# Altium PCB PAY_IFP_V1.PcbDoc (part 2 of 5)
Units mil, origin at the board's own origin, x right, y up, seen from the top; angles counter-clockwise.
Board outline 3661.42 x 3543.31 mil, 6 copper layers (L1 TOP, L2 GND 1, L3 SIGNAL, L4 PWR, L5 GND 2, L6 BOT), stack 59.685 mil thick; 511 components, 371 nets, 2264 pads, 383 vias.
Unrouted connection lines stored in the file: 1001.
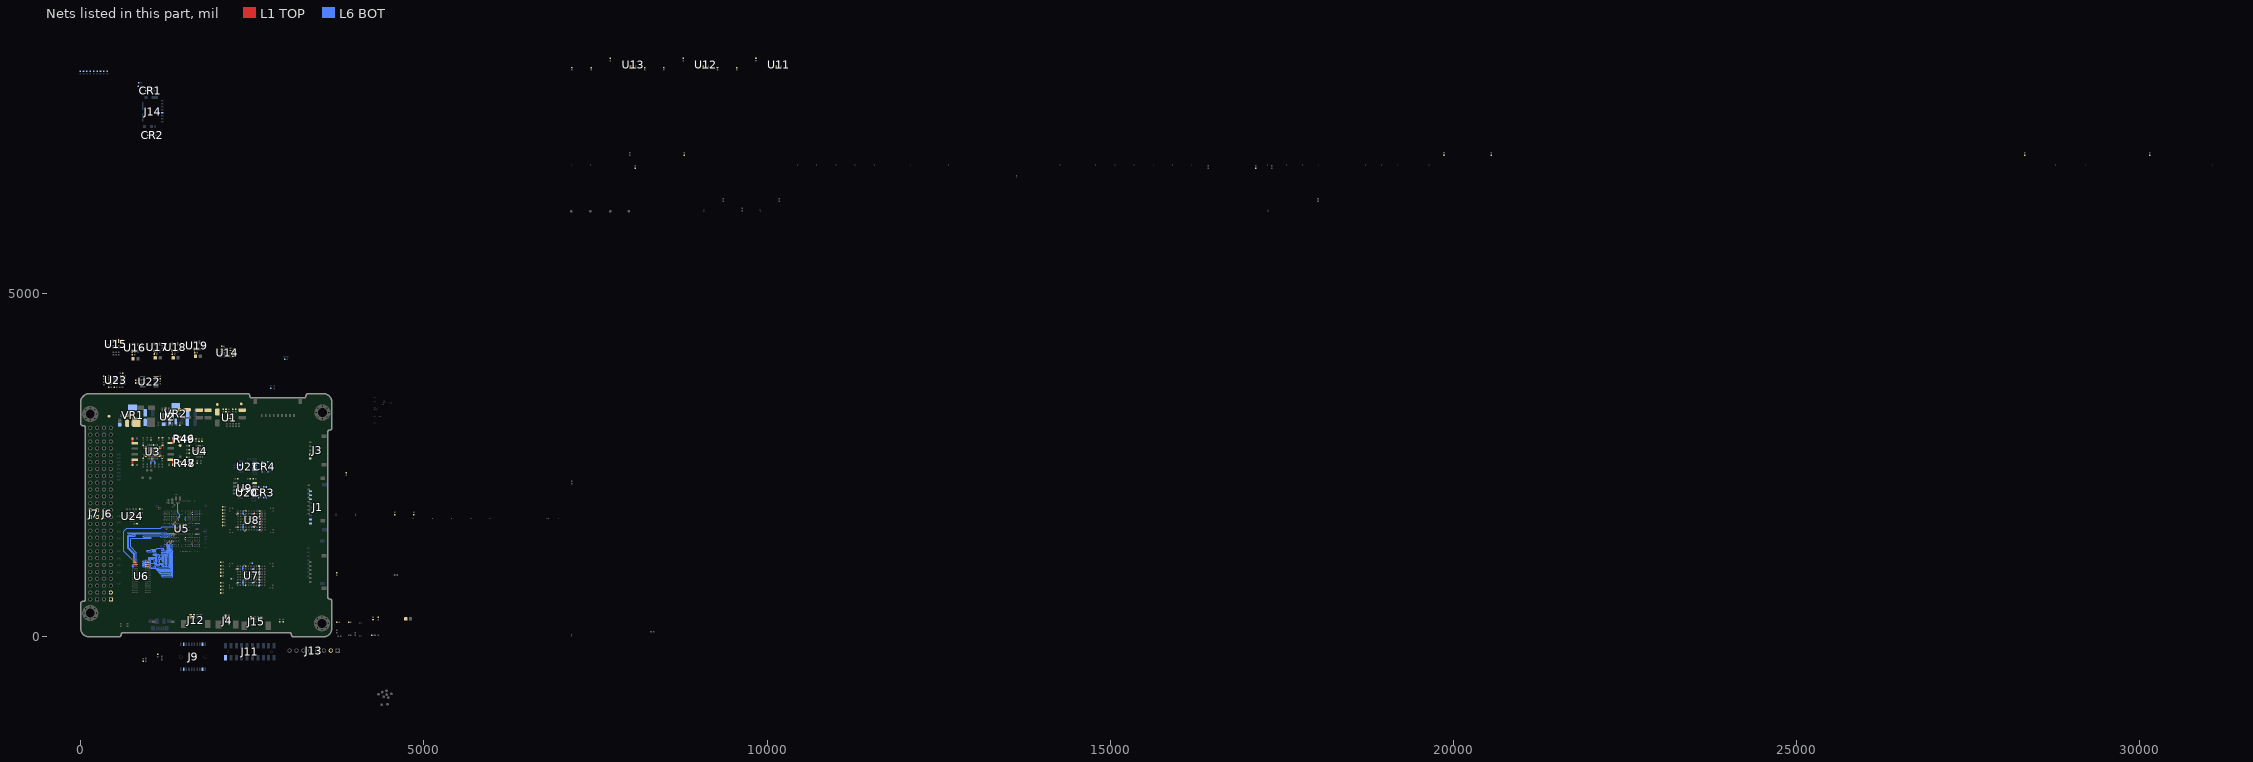
[diagram p2: the nets of this part, all layers, seen from the top]

## Footprints (in the part's own frame and the unit in brackets; to place one, negate y for a bottom-side part, rotate by r counter-clockwise, add the part's x,y. Pads: shape width x height; smd on the part's side, far side on the other; paste and mask are expansions set on the pad) (continued)
BGA_100_C_100P_10X17_1400X1800X150#1 [mm] "BGA, 100-Leads, Body 14.00x18.00mmx1.50mm, Pitch 1.00mm"
  round 0.49 smd: A1(-4.5,8) A2(-3.5,8) A9(3.5,8) A10(4.5,8) B1(-4.5,7) B10(4.5,7) D2(-3.5,5) D3(-2.5,5) D4(-1.5,5) D5(-0.5,5) D6(0.5,5) D7(1.5,5) D8(2.5,5) D9(3.5,5) E2(-3.5,4) E3(-2.5,4) E4(-1.5,4) E5(-0.5,4) E6(0.5,4) E7(1.5,4) E8(2.5,4) E9(3.5,4) F2(-3.5,3) F3(-2.5,3) F4(-1.5,3) F5(-0.5,3) F6(0.5,3) F7(1.5,3) F8(2.5,3) F9(3.5,3) G2(-3.5,2) G3(-2.5,2) G4(-1.5,2) G5(-0.5,2) G6(0.5,2) G7(1.5,2) G8(2.5,2) G9(3.5,2) H2(-3.5,1) H3(-2.5,1) H4(-1.5,1) H5(-0.5,1) H6(0.5,1) H7(1.5,1) H8(2.5,1) H9(3.5,1) J2(-3.5,0) J3(-2.5,0) J4(-1.5,0) J5(-0.5,0) J6(0.5,0) J7(1.5,0) J8(2.5,0) J9(3.5,0) K2(-3.5,-1) K3(-2.5,-1) K4(-1.5,-1) K5(-0.5,-1) K6(0.5,-1) K7(1.5,-1) K8(2.5,-1) K9(3.5,-1) L2(-3.5,-2) L3(-2.5,-2) L4(-1.5,-2) L5(-0.5,-2) L6(0.5,-2) L7(1.5,-2) L8(2.5,-2) L9(3.5,-2) M2(-3.5,-3) M3(-2.5,-3) M4(-1.5,-3) M5(-0.5,-3) M6(0.5,-3) M7(1.5,-3) M8(2.5,-3) M9(3.5,-3) N2(-3.5,-4) N3(-2.5,-4) N4(-1.5,-4) N5(-0.5,-4) N6(0.5,-4) N7(1.5,-4) N8(2.5,-4) N9(3.5,-4) P2(-3.5,-5) P3(-2.5,-5) P4(-1.5,-5) P5(-0.5,-5) P6(0.5,-5) P7(1.5,-5) P8(2.5,-5) P9(3.5,-5) T1(-4.5,-7) T10(4.5,-7) U1(-4.5,-8) U2(-3.5,-8) U9(3.5,-8) U10(4.5,-8)
  round 0.35 on Mech8 paste+0 mask+0: A1(-4.5,8) A2(-3.5,8) A9(3.5,8) B1(-4.5,7) B10(4.5,7) D2(-3.5,5) D3(-2.5,5) D4(-1.5,5) D5(-0.5,5) D6(0.5,5) D7(1.5,5) D8(2.5,5) D9(3.5,5) E2(-3.5,4) E3(-2.5,4) E4(-1.5,4) E5(-0.5,4) E6(0.5,4) E7(1.5,4) E8(2.5,4) E9(3.5,4) F2(-3.5,3) F3(-2.5,3) F4(-1.5,3) F5(-0.5,3) F6(0.5,3) F7(1.5,3) F8(2.5,3) F9(3.5,3) G2(-3.5,2) G3(-2.5,2) G4(-1.5,2) G5(-0.5,2) G6(0.5,2) G7(1.5,2) G8(2.5,2) G9(3.5,2) H2(-3.5,1) H3(-2.5,1) H4(-1.5,1) H5(-0.5,1) H6(0.5,1) H7(1.5,1) H8(2.5,1) H9(3.5,1) J2(-3.5,0) J3(-2.5,0) J4(-1.5,0) J5(-0.5,0) J6(0.5,0) J7(1.5,0) J8(2.5,0) J9(3.5,0) K2(-3.5,-1) K3(-2.5,-1) K4(-1.5,-1) K5(-0.5,-1) K6(0.5,-1) K7(1.5,-1) K8(2.5,-1) K9(3.5,-1) L2(-3.5,-2) L3(-2.5,-2) L4(-1.5,-2) L5(-0.5,-2) L6(0.5,-2) L7(1.5,-2) L8(2.5,-2) L9(3.5,-2) M2(-3.5,-3) M3(-2.5,-3) M4(-1.5,-3) M5(-0.5,-3) M6(0.5,-3) M7(1.5,-3) M8(2.5,-3) M9(3.5,-3) N2(-3.5,-4) N3(-2.5,-4) N4(-1.5,-4) N5(-0.5,-4) N6(0.5,-4) N7(1.5,-4) N8(2.5,-4) N9(3.5,-4) P2(-3.5,-5) P3(-2.5,-5) P4(-1.5,-5) P5(-0.5,-5) P6(0.5,-5) P7(1.5,-5) P8(2.5,-5) P9(3.5,-5) T1(-4.5,-7) T10(4.5,-7) U1(-4.5,-8) U2(-3.5,-8) U9(3.5,-8) U10(4.5,-8) ""(4.5,8)
  silkscreen extent -7.77,-9 7,9, body extent -7,-9 7,9, height 1.5
BGA_100_C_100P_10X17_1400X1800X150#2 [mm] "BGA, 100-Leads, Body 14.00x18.00mmx1.50mm, Pitch 1.00mm"
  round 0.49 smd: A1(-4.5,8) A2(-3.5,8) A9(3.5,8) A10(4.5,8) B1(-4.5,7) B10(4.5,7) D2(-3.5,5) D3(-2.5,5) D4(-1.5,5) D5(-0.5,5) D6(0.5,5) D7(1.5,5) D8(2.5,5) D9(3.5,5) E2(-3.5,4) E3(-2.5,4) E4(-1.5,4) E5(-0.5,4) E6(0.5,4) E7(1.5,4) E8(2.5,4) E9(3.5,4) F2(-3.5,3) F3(-2.5,3) F4(-1.5,3) F5(-0.5,3) F6(0.5,3) F7(1.5,3) F8(2.5,3) F9(3.5,3) G2(-3.5,2) G3(-2.5,2) G4(-1.5,2) G5(-0.5,2) G6(0.5,2) G7(1.5,2) G8(2.5,2) G9(3.5,2) H2(-3.5,1) H3(-2.5,1) H4(-1.5,1) H5(-0.5,1) H6(0.5,1) H7(1.5,1) H8(2.5,1) H9(3.5,1) J2(-3.5,0) J3(-2.5,0) J4(-1.5,0) J5(-0.5,0) J6(0.5,0) J7(1.5,0) J8(2.5,0) J9(3.5,0) K2(-3.5,-1) K3(-2.5,-1) K4(-1.5,-1) K5(-0.5,-1) K6(0.5,-1) K7(1.5,-1) K8(2.5,-1) K9(3.5,-1) L2(-3.5,-2) L3(-2.5,-2) L4(-1.5,-2) L5(-0.5,-2) L6(0.5,-2) L7(1.5,-2) L8(2.5,-2) L9(3.5,-2) M2(-3.5,-3) M3(-2.5,-3) M4(-1.5,-3) M5(-0.5,-3) M6(0.5,-3) M7(1.5,-3) M8(2.5,-3) M9(3.5,-3) N2(-3.5,-4) N3(-2.5,-4) N4(-1.5,-4) N5(-0.5,-4) N6(0.5,-4) N7(1.5,-4) N8(2.5,-4) N9(3.5,-4) P2(-3.5,-5) P3(-2.5,-5) P4(-1.5,-5) P5(-0.5,-5) P6(0.5,-5) P7(1.5,-5) P8(2.5,-5) P9(3.5,-5) T1(-4.5,-7) T10(4.5,-7) U1(-4.5,-8) U2(-3.5,-8) U9(3.5,-8) U10(4.5,-8)
  round 0.35 on Mech8 paste+0 mask+0: A1(-4.5,8) A2(-3.5,8) A9(3.5,8) A10(4.5,8) B1(-4.5,7) B10(4.5,7) D2(-3.5,5) D3(-2.5,5) D4(-1.5,5) D5(-0.5,5) D6(0.5,5) D7(1.5,5) D8(2.5,5) D9(3.5,5) E2(-3.5,4) E3(-2.5,4) E4(-1.5,4) E5(-0.5,4) E6(0.5,4) E7(1.5,4) E8(2.5,4) E9(3.5,4) F2(-3.5,3) F3(-2.5,3) F4(-1.5,3) F5(-0.5,3) F6(0.5,3) F7(1.5,3) F8(2.5,3) F9(3.5,3) G2(-3.5,2) G3(-2.5,2) G4(-1.5,2) G5(-0.5,2) G6(0.5,2) G7(1.5,2) G8(2.5,2) G9(3.5,2) H2(-3.5,1) H3(-2.5,1) H4(-1.5,1) H5(-0.5,1) H6(0.5,1) H7(1.5,1) H8(2.5,1) H9(3.5,1) J2(-3.5,0) J3(-2.5,0) J4(-1.5,0) J5(-0.5,0) J6(0.5,0) J7(1.5,0) J8(2.5,0) J9(3.5,0) K2(-3.5,-1) K3(-2.5,-1) K4(-1.5,-1) K5(-0.5,-1) K6(0.5,-1) K7(1.5,-1) K8(2.5,-1) K9(3.5,-1) L2(-3.5,-2) L3(-2.5,-2) L4(-1.5,-2) L5(-0.5,-2) L6(0.5,-2) L7(1.5,-2) L8(2.5,-2) L9(3.5,-2) M2(-3.5,-3) M3(-2.5,-3) M4(-1.5,-3) M5(-0.5,-3) M6(0.5,-3) M7(1.5,-3) M8(2.5,-3) M9(3.5,-3) N2(-3.5,-4) N3(-2.5,-4) N4(-1.5,-4) N5(-0.5,-4) N6(0.5,-4) N7(1.5,-4) N8(2.5,-4) N9(3.5,-4) P2(-3.5,-5) P3(-2.5,-5) P4(-1.5,-5) P5(-0.5,-5) P6(0.5,-5) P7(1.5,-5) P8(2.5,-5) P9(3.5,-5) T1(-4.5,-7) T10(4.5,-7) U1(-4.5,-8) U2(-3.5,-8) U9(3.5,-8) U10(4.5,-8)
  silkscreen extent -7.77,-9 7,9, body extent -7,-9 7,9, height 1.5
CAP_C_0603x30 [mm] "Chip Capacitor, 2-Leads, Body 0.6x0.3mm, IPC Medium Density"
  rrect50% 0.275x0.3 smd mask+0.064: 1(-0.262,0) 2(0.262,0)
  body extent -0.3,-0.15 0.3,0.15, height 0.28
CAP_C_1005X50_L [mm] "Chip Capacitor, 2-Leads, Body 1.0x0.5mm, IPC High Density"
  rrect50% 0.55x0.6 smd: 1(-0.45,0) 2(0.45,0)
  body extent -0.5,-0.3 0.5,0.3, height 0.2
CAP_C_1608X80 [mm] "Chip Capacitor, 2-Leads, Body 1.60x0.80mm, IPC Medium Density"
  rrect50% 0.8x0.9 smd: 1(-0.8,0) 2(0.8,0)
  silkscreen extent -0.9,-0.7 0.9,0.7, body extent -0.87,-0.48 0.87,0.48, height 0.85
CAP_C_2012X110 [mm] "Chip Capacitor, 2-Leads, Body 2.00x1.25mm, IPC High Density"
  rrect41% 1.2x1.3 smd: 1(-0.9,0) 2(0.9,0)
  silkscreen extent -1.1,-0.9 1.1,0.9, body extent -1.1,-0.72 1.1,0.72, height 1.1
CAP_C_3225X80 [mm] "Chip Capacitor, 2-Leads, Body 3.20x2.50mm, IPC Medium Density"
  rrect38% 1.3x2.7 smd: 1(-1.4,0) 2(1.4,0)
  silkscreen extent -0.6,-1.35 0.6,1.35, body extent -1.7,-1.35 1.7,1.35, height 0.75
CONV_TPS5430DDAR [mm] "IC REG BUCK ADJ 3A 8SOPWR"
  rrect10% 1.55x0.6 smd mask+0: 1(-2.7,1.905) 2(-2.7,0.635) 3(-2.7,-0.635) 4(-2.7,-1.905) 5(2.7,-1.905) 6(2.7,-0.635) 7(2.7,0.635) 8(2.7,1.905)
  round 0.3 hole 0.2 mask+0: 6(-0.65,1.95) 6(-0.65,-0.65) 6(-0.65,0.65) 6(-0.65,-1.95) 6(0.65,1.95) 6(0.65,-0.65) 6(0.65,0.65) 6(0.65,-1.95)
  rect 2.95x4.9 smd paste+0: 9(0,0)
  silkscreen extent -4.17,-2.69 1.96,2.72, body extent -3,-2.45 3,2.45, height 1.7
CRYSTAL_FC-12M_L2.05W1.2H0.6 [mm] "CRYSTAL 32.768KHZ 12.5PF SMD"
  rect 0.7x1.4 smd mask+0: 1(-0.75,0) 2(0.75,0)
  silkscreen extent -1.4,-1 1.4,1, body extent -1.02,-0.6 1.03,0.6, height 0.6
DIODE_SOT457_1P7X3P1_NEX [mil]
  rect 43.5x18 smd paste+0 mask+0: 1(-51.25,37.4) 2(-51.25,0) 3(-51.25,-37.4) 4(51.25,-37.4) 5(51.25,0) 6(51.25,37.4)
  silkscreen extent -95,-62 35,62, body extent -59,-57 59,57, height 43
DO-214AC_SMA [mm] "Molded Diode, 2-Leads, Body 5.20x2.61mm, IPC Medium Density"
  rrect30% 2.55x1.65 smd: 1(-2.05,0) 2(2.05,0)
  silkscreen extent -3.6,-1.5 2.8,1.5, body extent -2.6,-1.3 2.6,1.3, height 2.4
DS90LV011AQ-Q1 [mm]
  rrect50% 1.21x0.59 smd: 1(-1.255,0.95) 2(-1.255,0) 3(-1.255,-0.95) 4(1.255,-0.95) 5(1.255,0.95)
  silkscreen extent -1.45,-1.45 0.8,1.88, body extent -1.4,-1.45 1.4,1.45, height 1.45
Header_254P_8x1 [mm]
  rect 1.6x1.6 hole 1.1: 1(-8.89,0)
  round 1.6 hole 1.1: 2(-6.35,0) 3(-3.81,0) 4(-1.27,0) 5(1.27,0) 6(3.81,0) 7(6.35,0) 8(8.89,0)
  silkscreen extent -10.16,-1.27 10.16,1.27
HOLE_SPACE [mm]
  round 1 hole 0.5: 1(-2.325,0) 1(-1.644,-1.644) 1(-1.644,1.644) 1(0,-2.286) 1(0,2.325) 1(1.644,-1.644) 1(1.644,1.644) 1(2.325,0)
  round 6 hole 3.3: 1(0,0)
IC_RV-3129-C3-32.768KHZ-OPTION-A-TB-QA [mm]
  rect 0.8x0.5 smd: 1(-1.1,1.6) 2(-1.1,0.8) 3(-1.1,0) 4(-1.1,-0.8) 5(-1.1,-1.6) 6(1.1,-1.6) 7(1.1,-0.8) 8(1.1,0) 9(1.1,0.8) 10(1.1,1.6)
  silkscreen extent -2.25,-1.85 0.38,1.85, body extent -1.25,-1.85 1.25,1.85, height 0.9
IND_C_1008 [mm]
  rect 0.9x2.4 smd mask+0.075: 1(-1,0) 2(1,0)
  silkscreen extent -0.25,-1.1 0.25,1.1, body extent -1.24,-1 1.26,1, height 1.2
JUMPER_1608 [mil]
  round 1 smd: 1(30.51,0)
  round 1 smd paste-99999 mask+4: 2(-30,0)
  L1 TOP region: -14.86,-0.09 3.75,-18.7 -38.37,-18.7 -41.57,-18.06 -44.28,-16.25 -46.1,-13.54 -46.73,-10.33 -46.73,-10.33 -46.73,10.33 -46.1,13.54 -44.28,16.25 -41.57,18.06 -38.37,18.7 -38.37,18.7 3.93,18.7
  L1 TOP region: 38.88,-18.7 13.56,-18.7 -5,0 13.56,18.7 38.88,18.7 42.08,18.06 44.79,16.25 46.61,13.54 47.24,10.33 47.24,10.33 47.24,-10.33 46.61,-13.54 44.79,-16.25 42.08,-18.06 38.88,-18.7
  silkscreen extent -40,-27 41,27
LED_0402 [mm]
  rrect50% 0.65x0.6 smd mask+0.05: 1(-0.525,0) 2(0.525,0)
  silkscreen extent -1,-0.5 0.5,0.5, body extent -0.51,-0.25 0.51,0.25, height 0.45
MOLEX_0532610271 [mm]
  rect 0.8x1.6 smd mask+0.076: 1(-0.625,2.4) 2(0.625,2.4)
  rect 2.1x3 smd mask+0.076: M1(-3.175,-0.5) M2(3.175,-0.5)
  silkscreen extent -3.83,-2.6 3.83,4.64, body extent -3.83,-2.6 3.83,2.6, height 3.4
MOLEX_0532610471 [mm]
  rect 0.8x1.6 smd mask+0.076: 1(-1.875,2.4) 2(-0.625,2.4) 3(0.625,2.4) 4(1.875,2.4)
  rect 2.1x3 smd mask+0.076: M1(-4.425,-0.5) M2(4.425,-0.5)
  silkscreen extent -5.07,-2.6 5.07,4.75, body extent -5.07,-2.6 5.07,2.6, height 3.4
MOLEX_1051620001 [mil]
  rect 115x22 smd: 14(-84.45,146.35) 15(80.51,146.35)
  rect 41x43 smd: G1(209.65,17.02)
  rect 41x47 smd: G2(209.65,119.78) G3(-209.64,97.33)
  rect 41x94 smd: G4(-209.65,-28.06)
  rect 20x39 smd: P1(139.76,-138.49) P2(96.46,-138.49) P3(53.15,-138.49) P4(9.84,-138.49) P5(-33.46,-138.49) P6(-76.77,-138.49) P7(-120.08,-138.49) P8(-163.39,-138.49)
  rect 28x31 smd: P9(209.06,-32.98)
  silkscreen extent -228,-169 228,154, body extent -222,-485 226,150, height 59
MOLEX_5040500891 [mm]
  rect 0.6x1 smd mask+0.076: 1(5.25,-2.87) 2(3.75,-2.87) 3(2.25,-2.87) 4(0.75,-2.87) 5(-0.75,-2.87) 6(-2.25,-2.87) 7(-3.75,-2.87) 8(-5.25,-2.87)
  rect 1.25x1.8 smd mask+0.076: M1(7.855,2.32) M2(-7.855,2.32)
  silkscreen extent -8.27,-3.7 8.27,3.22, body extent -8.27,-3.2 8.27,3.24, height 2
MOLEX_5040500991 [mil]
  rect 26x41 smd paste+0 mask+0: 1(236.22,-119.76) 2(177.17,-119.76) 3(118.11,-119.76) 4(59.06,-119.76) 5(0,-119.76) 6(-59.06,-119.76) 7(-118.11,-119.76) 8(-177.17,-119.76) 9(-236.22,-119.76)
  rect 51x73 smd: M1(-326.97,84.57) M2(326.97,84.57)
  silkscreen extent -344,-150 344,125, body extent -355,-126 355,128, height 79
MSOP-12_MSE_LIT [mil]
  rect 52.5x17 smd paste+0 mask+0: 1(-87.25,64) 2(-87.25,38.4) 3(-87.25,12.8) 4(-87.25,-12.8) 5(-87.25,-38.4) 6(-87.25,-64) 7(87.25,-64) 8(87.25,-38.4) 9(87.25,-12.8) 10(87.25,12.8) 11(87.25,38.4) 12(87.25,64)
  rect 69x116 smd paste-57.5 mask+0: EPAD(0,0)
  silkscreen extent -138,-86 66,86, body extent -99,-81 99,81, height 43
QFN50P300X300X80-17N [mm]
  rrect7% 0.83x0.26 smd mask+0.04: 1(-1.47,0.75) 2(-1.47,0.25) 3(-1.47,-0.25) 4(-1.47,-0.75) 9(1.47,-0.75) 10(1.47,-0.25) 11(1.47,0.25) 12(1.47,0.75)
  rrect7% 0.26x0.83 smd mask+0.04: 5(-0.75,-1.47) 6(-0.25,-1.47) 7(0.25,-1.47) 8(0.75,-1.47) 13(0.75,1.47) 14(0.25,1.47) 15(-0.25,1.47) 16(-0.75,1.47)
  rect 1.7x1.7 smd paste-2 mask+0.04: 17(0,0)
  silkscreen extent -2.6,-1.58 1.58,1.58, body extent -1.5,-1.5 1.5,1.5, height 0.8
QFN-32_5X5_EP3.7X3.7 [mm] "QFN32_5MMwith ePAD"
  rrect50% 0.7x0.3 smd mask+0.05: 1(-2.5,1.75) 2(-2.5,1.25) 3(-2.5,0.75) 4(-2.5,0.25) 5(-2.5,-0.25) 6(-2.5,-0.75) 7(-2.5,-1.25) 8(-2.5,-1.75) 17(2.5,-1.75) 18(2.5,-1.25) 19(2.5,-0.75) 20(2.5,-0.25) 21(2.5,0.25) 22(2.5,0.75) 23(2.5,1.25) 24(2.5,1.75)
  rrect50% 0.3x0.7 smd mask+0.05: 9(-1.75,-2.5) 10(-1.25,-2.5) 11(-0.75,-2.5) 12(-0.25,-2.5) 13(0.25,-2.5) 14(0.75,-2.5) 15(1.25,-2.5) 16(1.75,-2.5) 25(1.75,2.5) 26(1.25,2.5) 27(0.75,2.5) 28(0.25,2.5) 29(-0.25,2.5) 30(-0.75,2.5) 31(-1.25,2.5) 32(-1.75,2.5)
  rect 3.7x3.7 smd mask+0.05: 33(0,0)
  silkscreen extent -2.65,-2.65 2.65,2.68, body extent -2.56,-2.56 2.56,2.56, height 1.01
RES_C_0603X30 [mm] "Chip Resistor, 2-Leads, Body 0.6x0.3mm, IPC Medium Density"
  rrect50% 0.275x0.3 smd mask+0.064: 1(-0.262,0) 2(0.262,0)
  body extent -0.3,-0.15 0.3,0.15, height 0.22
RES_C_1005x30_L#1 [mm] "Chip Resistor, 2-Leads, Body 1.0x0.5mm, IPC Medium Density"
  rrect50% 0.55x0.6 smd: 1(-0.45,0) 2(0.45,0)
  body extent -0.5,-0.3 0.5,0.3, height 0.2
RES_C_1005x30_L#2 [mm] "Chip Resistor, 2-Leads, Body 1.0x0.5mm, IPC Medium Density"
  rrect50% 0.55x0.6 smd mask+0.05: 1(-0.45,0) 2(0.45,0)
  body extent -0.5,-0.3 0.5,0.3, height 0.2
RES_C_1005X40 [mm]
  rrect50% 0.65x0.6 smd mask+0.05: 1(-0.5,0) 2(0.5,0)
  silkscreen extent -0.08,-0.3 0.08,0.3, body extent -0.5,-0.25 0.5,0.25, height 0.38
RES_C_1206_SHUNT [mm] "Chip Resistor, 2-Leads, Body 3.2x1.6mm, IPC Medium Density"
  rect 1x0.5 smd mask+0.1: 1(-1.5,-0.6) 1(-1.5,0.6) 2(1.5,-0.6) 2(1.5,0.6)
  rect 1x0.35 smd mask+0.1: 3(-1.5,0) 4(1.5,0)
  silkscreen extent -0.6,-0.77 0.6,0.78, body extent -1.6,-0.8 1.6,0.8, height 1
SAMTEC-TLE-110-01-X-DV-A [mm]
  rect 1.12x2.11 smd mask+0: 1(-9,-2.222) 2(-9,2.222) 3(-7,-2.222) 4(-7,2.222) 5(-5,-2.222) 6(-5,2.222) 7(-3,-2.222) 8(-3,2.222) 9(-1,-2.222) 10(-1,2.222) 11(1,-2.222) 12(1,2.222) 13(3,-2.222) 14(3,2.222) 15(5,-2.222) 16(5,2.222) 17(7,-2.222) 18(7,2.222) 19(9,-2.222) 20(9,2.222)
  round 0.76 hole 0.76 unplated: ""(-8,0) ""(8,0)
  silkscreen extent -10.45,-4.44 10.45,3.73, body extent -9.99,-2.78 9.99,2.78, height 4.32
SAMTEC_ESQ-126-14-G-D [mm]
  rect 1.53x1.53 hole 0.9: 01(0,0)
  round 1.53 hole 0.9: 02(0,2.54) 03(2.54,0) 04(2.54,2.54) 05(5.08,0) 06(5.08,2.54) 07(7.62,0) 08(7.62,2.54) 09(10.16,0) 10(10.16,2.54) 11(12.7,0) 12(12.7,2.54) 13(15.24,0) 14(15.24,2.54) 15(17.78,0) 16(17.78,2.54) 17(20.32,0) 18(20.32,2.54) 19(22.86,0) 20(22.86,2.54) 21(25.4,0) 22(25.4,2.54) 23(27.94,0) 24(27.94,2.54) 25(30.48,0) 26(30.48,2.54) 27(33.02,0) 28(33.02,2.54) 29(35.56,0) 30(35.56,2.54) 31(38.1,0) 32(38.1,2.54) 33(40.64,0) 34(40.64,2.54) 35(43.18,0) 36(43.18,2.54) 37(45.72,0) 38(45.72,2.54) 39(48.26,0) 40(48.26,2.54) 41(50.8,0) 42(50.8,2.54) 43(53.34,0) 44(53.34,2.54) 45(55.88,0) 46(55.88,2.54) 47(58.42,0) 48(58.42,2.54) 49(60.96,0) 50(60.96,2.54) 51(63.5,0) 52(63.5,2.54)
  silkscreen extent -2.27,-1.2 65.03,3.74, body extent -1.52,-1.27 65.02,3.81, height 11.1
SAMTEC_FSI-110-03-X-D-AD-TR [mm]
  rect 0.61x1.26 smd: 01(-4.5,4.59) 02(-4.5,-4.59) 03(-3.5,4.59) 04(-3.5,-4.59) 05(-2.5,4.59) 06(-2.5,-4.59) 07(-1.5,4.59) 08(-1.5,-4.59) 09(-0.5,4.59) 10(-0.5,-4.59) 11(0.5,4.59) 12(0.5,-4.59) 13(1.5,4.59) 14(1.5,-4.59) 15(2.5,4.59) 16(2.5,-4.59) 17(3.5,4.59) 18(3.5,-4.59) 19(4.5,4.59) 20(4.5,-4.59)
  round 1.19 hole 1.19 unplated: ""(-4.5,0) ""(4.5,0)
  silkscreen extent -5.38,-4.38 5.38,5.9, body extent -5.38,-5 5.38,5, height 4.37
SOIC127P599X175-8N [mm]
  rrect25% 1.97x0.6 smd paste+0 mask+0.102: 1(-2.47,1.905) 2(-2.47,0.635) 3(-2.47,-0.635) 4(-2.47,-1.905) 5(2.47,-1.905) 6(2.47,-0.635) 7(2.47,0.635) 8(2.47,1.905)
  silkscreen extent -4.14,-2.52 1.95,2.52, body extent -3,-2.45 3,2.45, height 1.75
SOIC127P790X216-8N [mm]
  rect 1.65x0.7 smd: 1(-3.6,1.905) 2(-3.6,0.635) 3(-3.6,-0.635) 4(-3.6,-1.905) 5(3.6,-1.905) 6(3.6,-0.635) 7(3.6,0.635) 8(3.6,1.905)
  silkscreen extent -4.27,-2.62 2.42,2.62, body extent -3.95,-2.62 3.95,2.62, height 2.16
SOT323-3L_STM [mil]
  rect 18x40 smd paste+0 mask+0: 1(-25.59,-41) 2(25.59,-41) 3(0,41)
  silkscreen extent -48,-87 48,32, body extent -44,-47 44,47, height 43
SOT-23_MC_MCH [mil]
  rect 24x52 smd paste+0 mask+0: 1(-37.4,-39.97) 2(37.4,-39.97) 3(0,39.97)
  silkscreen extent -65,-94 65,33, body extent -60,-52 60,52, height 44
SRP7050TA-220M [mm]
  rect 2.95x3.5 smd: 1(-2.725,0) 2(2.725,0)
  silkscreen extent -4.4,-3.3 4.4,3.3, body extent -3.65,-3.3 3.65,3.3, height 4.6
SW2-SMD [mm]
  rect 1.2x0.8 smd: 1(-3.5,0) 2(3.5,0)
  silkscreen extent -2.82,-1.85 2.82,1.85, body extent -3.05,-1.85 3.05,1.85, height 2.5
"Test point" [mm]
  round 1 smd paste-2539.97 mask+0: 0(0,0)
  silkscreen extent -0.61,-0.61 0.61,0.61
TFBGA-343_14x14 [mm] "BGA, 343-Leads, Body 14,00mm x14,00mm, Pitch 0,65mm"
  round 0.3 smd mask+0.05: A1(-6.5,6.5) A2(-5.85,6.5) A3(-5.2,6.5) A4(-4.55,6.5) A5(-3.9,6.5) A6(-3.25,6.5) A7(-2.6,6.5) A8(-1.95,6.5) A9(-1.3,6.5) A11(0,6.5) A13(1.3,6.5) A14(1.95,6.5) A15(2.6,6.5) A16(3.25,6.5) A17(3.9,6.5) A18(4.55,6.5) A19(5.2,6.5) A20(5.85,6.5) A21(6.5,6.5) AA1(-6.5,-6.5) AA2(-5.85,-6.5) AA3(-5.2,-6.5) AA4(-4.55,-6.5) AA5(-3.9,-6.5) AA6(-3.25,-6.5) AA7(-2.6,-6.5) AA8(-1.95,-6.5) AA9(-1.3,-6.5) AA11(0,-6.5) AA13(1.3,-6.5) AA14(1.95,-6.5) AA15(2.6,-6.5) AA16(3.25,-6.5) AA17(3.9,-6.5) AA18(4.55,-6.5) AA19(5.2,-6.5) AA20(5.85,-6.5) AA21(6.5,-6.5) B1(-6.5,5.85) B2(-5.85,5.85) B3(-5.2,5.85) B4(-4.55,5.85) B6(-3.25,5.85) B7(-2.6,5.85) B9(-1.3,5.85) B13(1.3,5.85) B15(2.6,5.85) B16(3.25,5.85) B18(4.55,5.85) B19(5.2,5.85) B20(5.85,5.85) B21(6.5,5.85) C1(-6.5,5.2) C2(-5.85,5.2) C3(-5.2,5.2) C4(-4.55,5.2) C5(-3.9,5.2) C6(-3.25,5.2) C7(-2.6,5.2) C8(-1.95,5.2) C11(0,5.2) C14(1.95,5.2) C15(2.6,5.2) C16(3.25,5.2) C17(3.9,5.2) C18(4.55,5.2) C19(5.2,5.2) C20(5.85,5.2) C21(6.5,5.2) D1(-6.5,4.55) D2(-5.85,4.55) D3(-5.2,4.55) D4(-4.55,4.55) D5(-3.9,4.55) D6(-3.25,4.55) D7(-2.6,4.55) D8(-1.95,4.55) D9(-1.3,4.55) D13(1.3,4.55) D14(1.95,4.55) D15(2.6,4.55) D16(3.25,4.55) D17(3.9,4.55) D18(4.55,4.55) D19(5.2,4.55) D20(5.85,4.55) D21(6.5,4.55) E1(-6.5,3.9) E3(-5.2,3.9) E4(-4.55,3.9) E5(-3.9,3.9) E6(-3.25,3.9) E7(-2.6,3.9) E8(-1.95,3.9) E14(1.95,3.9) E15(2.6,3.9) E16(3.25,3.9) E17(3.9,3.9) E18(4.55,3.9) E19(5.2,3.9) E21(6.5,3.9) F1(-6.5,3.25) F2(-5.85,3.25) F3(-5.2,3.25) F4(-4.55,3.25) F5(-3.9,3.25) F6(-3.25,3.25) F7(-2.6,3.25) F8(-1.95,3.25) F9(-1.3,3.25) F13(1.3,3.25) F14(1.95,3.25) F15(2.6,3.25) F16(3.25,3.25) F17(3.9,3.25) F18(4.55,3.25) F19(5.2,3.25) F20(5.85,3.25) F21(6.5,3.25) G1(-6.5,2.6) G2(-5.85,2.6) G3(-5.2,2.6) G4(-4.55,2.6) G5(-3.9,2.6) G6(-3.25,2.6) G7(-2.6,2.6) G8(-1.95,2.6) G9(-1.3,2.6) G10(-0.65,2.6) G11(0,2.6) G12(0.65,2.6) G13(1.3,2.6) G14(1.95,2.6) G15(2.6,2.6) G16(3.25,2.6) G17(3.9,2.6) G18(4.55,2.6) G19(5.2,2.6) G20(5.85,2.6) G21(6.5,2.6) H1(-6.5,1.95) H3(-5.2,1.95) H4(-4.55,1.95) H5(-3.9,1.95) H6(-3.25,1.95) H7(-2.6,1.95) H8(-1.95,1.95) H9(-1.3,1.95) H10(-0.65,1.95) H11(0,1.95) H12(0.65,1.95) H13(1.3,1.95) H14(1.95,1.95) H15(2.6,1.95) H16(3.25,1.95) H17(3.9,1.95) H18(4.55,1.95) H19(5.2,1.95) H21(6.5,1.95) J1(-6.5,1.3) J2(-5.85,1.3) J4(-4.55,1.3) J6(-3.25,1.3) J7(-2.6,1.3) J8(-1.95,1.3) J9(-1.3,1.3) J10(-0.65,1.3) J11(0,1.3) J12(0.65,1.3) J13(1.3,1.3) J14(1.95,1.3) J15(2.6,1.3) J16(3.25,1.3) J18(4.55,1.3) J20(5.85,1.3) J21(6.5,1.3) K7(-2.6,0.65) K8(-1.95,0.65) K9(-1.3,0.65) K10(-0.65,0.65) K11(0,0.65) K12(0.65,0.65) K13(1.3,0.65) K14(1.95,0.65) K15(2.6,0.65) L1(-6.5,0) L3(-5.2,0) L7(-2.6,0) L8(-1.95,0) L9(-1.3,0) L11(0,0) L13(1.3,0) L14(1.95,0) L15(2.6,0) L19(5.2,0) L21(6.5,0) M7(-2.6,-0.65) M8(-1.95,-0.65) M9(-1.3,-0.65) M10(-0.65,-0.65) M11(0,-0.65) M12(0.65,-0.65) M13(1.3,-0.65) M14(1.95,-0.65) M15(2.6,-0.65) N1(-6.5,-1.3) N2(-5.85,-1.3) N4(-4.55,-1.3) N6(-3.25,-1.3) N7(-2.6,-1.3) N8(-1.95,-1.3) N9(-1.3,-1.3) N10(-0.65,-1.3) N11(0,-1.3) N12(0.65,-1.3) N13(1.3,-1.3) N14(1.95,-1.3) N15(2.6,-1.3) N16(3.25,-1.3) N18(4.55,-1.3) N20(5.85,-1.3) N21(6.5,-1.3) P1(-6.5,-1.95) P3(-5.2,-1.95) P4(-4.55,-1.95) P5(-3.9,-1.95) P6(-3.25,-1.95) P7(-2.6,-1.95) P8(-1.95,-1.95) P9(-1.3,-1.95) P10(-0.65,-1.95) P11(0,-1.95) P12(0.65,-1.95) P13(1.3,-1.95) P14(1.95,-1.95) P15(2.6,-1.95) P16(3.25,-1.95) P17(3.9,-1.95) P18(4.55,-1.95) P19(5.2,-1.95) P21(6.5,-1.95) R1(-6.5,-2.6) R2(-5.85,-2.6) R3(-5.2,-2.6) R4(-4.55,-2.6) R5(-3.9,-2.6) R6(-3.25,-2.6) R7(-2.6,-2.6) R8(-1.95,-2.6) R9(-1.3,-2.6) R10(-0.65,-2.6) R11(0,-2.6) R12(0.65,-2.6) R13(1.3,-2.6) R14(1.95,-2.6) R15(2.6,-2.6) R16(3.25,-2.6) R17(3.9,-2.6) R18(4.55,-2.6) R19(5.2,-2.6) R20(5.85,-2.6) R21(6.5,-2.6) T1(-6.5,-3.25) T2(-5.85,-3.25) T3(-5.2,-3.25) T4(-4.55,-3.25) T5(-3.9,-3.25) T6(-3.25,-3.25) T7(-2.6,-3.25) T8(-1.95,-3.25) T9(-1.3,-3.25) T13(1.3,-3.25) T14(1.95,-3.25) T15(2.6,-3.25) T16(3.25,-3.25) T17(3.9,-3.25) T18(4.55,-3.25) T19(5.2,-3.25) T20(5.85,-3.25) T21(6.5,-3.25) U1(-6.5,-3.9) U3(-5.2,-3.9) U4(-4.55,-3.9) U5(-3.9,-3.9) U6(-3.25,-3.9) U7(-2.6,-3.9) U8(-1.95,-3.9) U14(1.95,-3.9) U15(2.6,-3.9) U16(3.25,-3.9) U17(3.9,-3.9) U18(4.55,-3.9) U19(5.2,-3.9) U21(6.5,-3.9) V1(-6.5,-4.55) V2(-5.85,-4.55) V3(-5.2,-4.55) V4(-4.55,-4.55) V5(-3.9,-4.55) V6(-3.25,-4.55) V7(-2.6,-4.55) V8(-1.95,-4.55) V9(-1.3,-4.55) V13(1.3,-4.55) V14(1.95,-4.55) V15(2.6,-4.55) V16(3.25,-4.55) V17(3.9,-4.55) V18(4.55,-4.55) V19(5.2,-4.55) V20(5.85,-4.55) V21(6.5,-4.55) W1(-6.5,-5.2) W2(-5.85,-5.2) W3(-5.2,-5.2) W4(-4.55,-5.2) W5(-3.9,-5.2) W6(-3.25,-5.2) W7(-2.6,-5.2) W8(-1.95,-5.2) W11(0,-5.2) W14(1.95,-5.2) W15(2.6,-5.2) W16(3.25,-5.2) W17(3.9,-5.2) W18(4.55,-5.2) W19(5.2,-5.2) W20(5.85,-5.2) W21(6.5,-5.2) Y1(-6.5,-5.85) Y2(-5.85,-5.85) Y3(-5.2,-5.85) Y4(-4.55,-5.85) Y6(-3.25,-5.85) Y7(-2.6,-5.85) Y9(-1.3,-5.85) Y13(1.3,-5.85) Y15(2.6,-5.85) Y16(3.25,-5.85) Y18(4.55,-5.85) Y19(5.2,-5.85) Y20(5.85,-5.85) Y21(6.5,-5.85)
  silkscreen extent -7.15,-7.15 7.15,7.15, body extent -7,-7 7,7, height 1.22
TPL5010DDCR [mm]
  rrect25% 1.45x0.59 smd: 1(-1.155,0.95) 2(-1.155,0) 3(-1.155,-0.95) 4(1.155,-0.95) 5(1.155,0) 6(1.155,0.95)
  silkscreen extent -2.5,-1.57 0.8,1.57, body extent -1.4,-1.45 1.4,1.45, height 1.1
TWBGA96_ISI [mil]
  round 16 smd paste+0 mask+0: A1(-125.98,236.22) A2(-94.49,236.22) A3(-62.99,236.22) A7(62.99,236.22) A8(94.49,236.22) A9(125.98,236.22) B1(-125.98,204.72) B2(-94.49,204.72) B3(-62.99,204.72) B7(62.99,204.72) B8(94.49,204.72) B9(125.98,204.72) C1(-125.98,173.23) C2(-94.49,173.23) C3(-62.99,173.23) C7(62.99,173.23) C8(94.49,173.23) C9(125.98,173.23) D1(-125.98,141.73) D2(-94.49,141.73) D3(-62.99,141.73) D7(62.99,141.73) D8(94.49,141.73) D9(125.98,141.73) E1(-125.98,110.24) E2(-94.49,110.24) E3(-62.99,110.24) E7(62.99,110.24) E8(94.49,110.24) E9(125.98,110.24) F1(-125.98,78.74) F2(-94.49,78.74) F3(-62.99,78.74) F7(62.99,78.74) F8(94.49,78.74) F9(125.98,78.74) G1(-125.98,47.24) G2(-94.49,47.24) G3(-62.99,47.24) G7(62.99,47.24) G8(94.49,47.24) G9(125.98,47.24) H1(-125.98,15.75) H2(-94.49,15.75) H3(-62.99,15.75) H7(62.99,15.75) H8(94.49,15.75) H9(125.98,15.75) J1(-125.98,-15.75) J2(-94.49,-15.75) J3(-62.99,-15.75) J7(62.99,-15.75) J8(94.49,-15.75) J9(125.98,-15.75) K1(-125.98,-47.24) K2(-94.49,-47.24) K3(-62.99,-47.24) K7(62.99,-47.24) K8(94.49,-47.24) K9(125.98,-47.24) L1(-125.98,-78.74) L2(-94.49,-78.74) L3(-62.99,-78.74) L7(62.99,-78.74) L8(94.49,-78.74) L9(125.98,-78.74) M1(-125.98,-110.24) M2(-94.49,-110.24) M3(-62.99,-110.24) M7(62.99,-110.24) M8(94.49,-110.24) M9(125.98,-110.24) N1(-125.98,-141.73) N2(-94.49,-141.73) N3(-62.99,-141.73) N7(62.99,-141.73) N8(94.49,-141.73) N9(125.98,-141.73) P1(-125.98,-173.23) P2(-94.49,-173.23) P3(-62.99,-173.23) P7(62.99,-173.23) P8(94.49,-173.23) P9(125.98,-173.23) R1(-125.98,-204.72) R2(-94.49,-204.72) R3(-62.99,-204.72) R7(62.99,-204.72) R8(94.49,-204.72) R9(125.98,-204.72) T1(-125.98,-236.22) T2(-94.49,-236.22) T3(-62.99,-236.22) T7(62.99,-236.22) T8(94.49,-236.22) T9(125.98,-236.22)
  silkscreen extent -227,-288 209,288, body extent -199,-277 199,277, height 47
UQFN-16_4X4_EP2.6X2.6 [mm]
  rrect50% 0.8x0.35 smd paste+0 mask+0.075: 1(-2,0.975) 2(-2,0.325) 3(-2,-0.325) 4(-2,-0.975) 9(2,-0.975) 10(2,-0.325) 11(2,0.325) 12(2,0.975)
  rrect50% 0.35x0.8 smd paste+0 mask+0.057: 5(-0.975,-2) 6(-0.325,-2) 7(0.325,-2) 8(0.975,-2) 13(0.975,2) 14(0.325,2) 15(-0.325,2) 16(-0.975,2)
  rect 2.6x2.6 smd paste-0.25 mask+0.075: 17(0,0)
  silkscreen extent -2.15,-2.15 2.15,2.15, body extent -2,-2 2,2, height 0.5
VQFN-HR-10 [mm]
  rect 0.65x0.3 smd: 1(-0.938,0.692) 4(-0.941,-0.708) 7(0.909,-0.708) 10(0.909,0.692)
  rect 0.25x0.65 smd: 1(-0.738,0.867) 4(-0.741,-0.883) 7(0.709,-0.883) 10(0.709,0.867)
  rect 0.65x0.25 smd: 2(-0.938,0.216) 3(-0.941,-0.233) 8(0.909,-0.233) 9(0.909,0.216)
  rect 0.3x2.4 smd: 5(-0.265,-0.008) 6(0.235,-0.007)
  silkscreen extent -1.3,-1.25 1.28,1.23, body extent -1.03,-1.01 0.97,0.99, height 1
VREG_LM1117MP-3.3/NOPB [mm]
  rect 2.15x0.95 smd: 1(-2.9,2.3) 2(-2.9,0) 3(-2.9,-2.3)
  rect 2.15x3.25 smd: 4(2.9,0)
  silkscreen extent -4.7,-3.25 1.75,3.25, body extent -3.5,-3.25 3.5,3.25, height 1.8
XTAL_ECS2401037B2JTNTR [mm]
  rect 0.85x0.75 smd paste+0 mask+0.102: 1(-0.675,-0.525) 2(0.675,-0.525) 3(0.675,0.525) 4(-0.675,0.525)
  silkscreen extent -0.78,-1.57 -0.58,-1.37, body extent -1,-0.8 1,0.8, height 0.5

## Part data
BT1: library part BT2, "Switch button 2 pin"
C1 C2 C3 C4 C9 C10 C11 C12 C14 C15 C16 C17 C18 C19 C165 C167 C169 C171: library part _CAP_C_High_2, "CAP CHIP High Value"
C5 C6 C7 C8 C13 C20 C21 C22 C23 C24 C25 C26 C27 C28 C29 C30 C31 C32 C33 C34 C35 C36 C37 C38 C39 C40 C41 C42 C43 C44 C45 C46 C47 C48 C49 C50 C51 C52 C53 C54 C55 C56 C57 C58 C59 C60 C61 C62 C63 C64 C65 C66 C67 C68 C69 C70 C71 C72 C73 C74 C75 C76 C77 C78 C79 C80 C81 C82 C83 C84 C85 C86 C87 C88 C89 C90 C91 C92 C93 C94 C95 C96 C97 C98 C99 C100 C101 C102 C103 C104 C105 C106 C107 C108 C109 C110 C111 C112 C113 C114 C115 C116 C117 C118 C119 C120 C121 C122 C123 C124 C125 C126 C127 C128 C129 C130 C131 C132 C133 C134 C135 C136 C137 C138 C139 C140 C141 C142 C143 C144 C145 C146 C147 C148 C149 C150 C151 C152 C153 C154 C155 C156 C157 C158 C159 C160 C161 C162 C163 C164 C166 C168 C170 C172 C173 C174 C175 C176 C177 C178 C179 C180 C181 C182 C183 C184: library part _CAP_C_2, "CAP CHIP"
CR1 CR2: "TVS DIODE 5.5VWM 6TSOP", Manufacturer_Name=Nexperia, Copyright="Copyright (C) 2025 Ultra Librarian. All rights reserved.", Manufacturer_Part_Number=IP4220CZ6,125, RefDes=RefDes, TYPE=Type
CR3 CR4: "TVS DIODE 26.5VWM 44VC SOT3233", Manufacturer_Name=STMicroelectronics, Copyright="Copyright (C) 2025 Ultra Librarian. All rights reserved.", Manufacturer_Part_Number=ESDCAN02-2BWY, RefDes=RefDes, TYPE=Type
D1: library part LED_RED, "LED RED CLEAR 0402 SMD"
D2 D3: "DIODE SCHOTTKY 40V 5A SMA", MPN=SS34, Solder=SMT
D4: library part LED_YELLOW, "LED YELLOW CLEAR 0402 SMD"
D5 D6 D9: library part LED_GREEN, "LED GREEN CLEAR 0402 SMD"
D7 D8: library part LED_BLUE
J1 J8: "Connector Header Surface Mount, Right Angle 9 position 0.059\" (1.50mm)"
J2 J5: "Connector Header Surface Mount, Right Angle 8 position 0.059\" (1.50mm)`"
J3: "1.50mm Pitch, Pico-Lock PCB Header, Single Row, Right-Angle, Surface Mount, Gold (Au) Plating, Positive Lock, 5 Circuits, Tape and Reel", Manufacturer_Name="Molex Connector Corporation", Copyright="Copyright (C) 2025 Ultra Librarian. All rights reserved.", Manufacturer_Part_Number=5040500591, RefDes=RefDes, TYPE=Type
J4: library part "Header 2x1_2M"
J6 J7: "CONN SOCKET 52POS 0.1 GOLD PCB", Package=None, Availability=Unavailable, MF=Samtec, MP=ESQ-126-14-G-D, Price=None
J9: library part FSI-110-03-X-D-AD-TR, "CONN STACKING 20POS SMD GOLD", Package=None, Availability=Unavailable, MP=FSI-110-03-X-D-AD-TR, Price=None
J10: "1.50mm Pitch, Pico-Lock PCB Header, Single Row, Right-Angle, Surface Mount, Gold (Au) Plating, Positive Lock, 6 Circuits, Tape and Reel", Manufacturer_Name="Molex Connector Corporation", Copyright="Copyright (C) 2025 Ultra Librarian. All rights reserved.", Datasheet=https://www.molex.com/en-us/products/part-detail-pdf/5040500691?display=pdf, Manufacturer_Part_Number=5040500691, RefDes=RefDes, TYPE=Type
J11: library part SAMTEC-TLE-110-01-X-DV-A, "CONN RCPT 20POS 0.079 GOLD SMD", Package=None, Availability=Unavailable, MP=SAMTEC-TLE-110-01-X-DV-A, Price=None
J12 J15: library part "Header 4x1_2M"
J14: "9 (8 + 1) Position Card Connector Secure Digital - microSDâ„¢ Surface Mount, Right Angle Gold", Package=None, Check_prices=https://www.snapeda.com/parts/1051620001/Molex/view-part/?ref=eda, MF=Molex, MP=1051620001, SnapEDA_Link=https://www.snapeda.com/parts/1051620001/Molex/view-part/?ref=snap
L1: library part _IND, "FIXED IND 22UH 2.5A 170 MOHM SMD"
L2 L3 L4 L5: library part DFE252012P-1R5M=P2, "Fixed Inductor 1.5uH 3.5A R060 SMD", Package=None, Availability=Unavailable, MP=DFE252012P-1R5M=P2, Price=None
R1 R2 R3 R4 R5 R6 R7 R8 R9 R10 R11 R12 R13 R14 R15 R16 R17 R18 R19 R20 R21 R22 R23 R24 R25 R26 R27 R28 R29 R30 R31 R32 R33 R34 R35 R36 R37 R38 R39 R40 R41 R42 R43 R44 R45 R50 R51 R52 R53 R54 R55 R56 R57 R58 R59 R60 R61 R62 R63 R64 R65 R66 R67 R68 R69 R70 R71 R72 R73 R74 R75 R76 R77 R78 R79 R80 R81 R82 R83 R84 R85 R86 R87 R88 R89 R90 R91 R92 R93 R94 R95 R96 R97 R98 R99 R100 R101 R102 R103 R104 R105 R106 R107 R108 R109 R110 R111 R112 R113 R114 R115 R116 R117 R118 R119 R120 R121 R122 R123 R124 R125 R126 R127 R128 R129 R130 R131 R132 R133 R134 R135 R136 R137 R138 R139 R140 R141 R142 R143 R144 R145 R146 R147 R148 R149 R150 R151 R152 R153 R154 R155 R156 R157 R158 R159 R160 R161 R162 R163 R164 R165 R166 R167 R168 R169 R170 R171 R172 R173 R174 R175 R176 R177 R178 R179 R180 R181 R182 R183 R184 R185 R186 R187 R188 R189 R190 R191 R192 R193 R194 R195 R196 R197 R198 R199 R200 R201 R202 R203 R204 R205 R206 R207 R208 R209 R210 R211 R212 R213 R214 R215 R216 R217 R218 R219 R220 R221 R222 R223 R224 R225 R226 R227 R228 R229 R230 R231 R232 R233 R234 R235 R236 R237: library part _RES_B_2, "RES"
R46 R47 R48 R49: library part SHUNT, "Shunt Resistor, RES 0.047 OHM 1% 3/4W 1206", Current=4A, Manufacturer 1=SUSUMU, Manufacturer Part Number 1=KRL1632E-M-R047-F-T5, Operating Temperature="-55C to 155C", Package=1206, Power=3/4W, Supplier Part Number 1=408-1578-2-ND, Temperature Coefficient=±50ppm/C, Tolerance=1%, Category=Resistor, ComponentLink1Description="SVN Datasheet", ComponentLink1URL=https://chn-vm-apps.microchip.com/mchprepo/parts/Datasheets/n_catalog_partition09_en.pdf, ComponentLink2Description="Local Datasheet", ComponentLink2URL=C:\ALTIUM_WORK\00001_MCHP-CDB\Datasheets\n_catalog_partition09_en.pdf, ComponentLink3Description="Open Symbol", ComponentLink3URL="C:\ALTIUM_WORK\00001_MCHP-CDB\Library\LibraryRefs\Shunt 4 Pin.SchLib", ComponentLink4Description="Open Footprint", ComponentLink4URL=C:\ALTIUM_WORK\00001_MCHP-CDB\Library\Footprints\RES_C_1206_SHUNT.PcbLib, ComponentLink5Description="Open Footprint 2", ComponentLink6Description="Open Footprint 3", ComponentLink7Description="Open Footprint 4", Composition=MF, Description_="RES SHUNT MF 0.047R 1% 3/4W SMD 1206", Dev Tools Status=Design, MCHP-ID=RSMT1405, Owner="Ciprian Abramov", Populated=YES, Quantity Override=1, Restricted Sourcing=No, Revision=1, Status="MCL Design", Supplier 1=Digi-Key, Symbol="Shunt 4 Pin", TYPE=Shunt
TP1 TP2 TP3 TP4 TP5 TP6 TP7 TP8 TP9 TP10 TP11 TP12 TP13 TP14 TP15 TP16 TP17 TP18 TP19 TP20 TP21 TP22: library part "Test Point", "Test Point", Solder=NF
U2: "5.5V to 36V Input, 3A, 500kHz Step-Down Converter", Package="HSOIC-8 Texas Instruments", Availability="In Stock", Check_prices=https://www.snapeda.com/parts/TPS5430DDAR/Texas+Instruments/view-part/?ref=eda, MF="Texas Instruments", MP=TPS5430DDAR, Price=None, Purchase-URL=https://pricing.snapeda.com/search/part/TPS5430DDAR/?ref=eda, SnapEDA_Link=https://www.snapeda.com/parts/TPS5430DDAR/Texas+Instruments/view-part/?ref=snap
U3: library part MIC8878, Manufacturer 1="Microchip Technology", Manufacturer Part Number 1=MCP16502TAB-E/S8B, Supplier Part Number 1=150-MCP16502TAB-E/S8BCT-ND, Category=MCHP-Analog, ComponentLink1Description="SVN Datasheet", ComponentLink2Description="Local Datasheet", ComponentLink2URL=C:\ALTIUM_WORK\00001_MCHP-CDB\Datasheets\MCP16502-High-Performance-PMIC-for-SAMA5DX-SAM9X6-MPUs-Data-Sheet-DS20006275B.pdf, ComponentLink3Description="Open Symbol", ComponentLink3URL="C:\ALTIUM_WORK\00001_MCHP-CDB\Library\LibraryRefs\MCP16502 QFN-32.SchLib", ComponentLink4Description="Open Footprint", ComponentLink4URL=C:\ALTIUM_WORK\00001_MCHP-CDB\Library\Footprints\QFN-32_5X5_EP3.7X3.7.PcbLib, ComponentLink5Description="Open Footprint 2", ComponentLink6Description="Open Footprint 3", ComponentLink7Description="Open Footprint 4", Description_="MCHP ANALOG PMIC SWITCHER Buck ADJ MCP16502TAB-E/S8B QFN-32 for SAMA7G5 MPU with LPDDR/DDR2/DDR3", Dev Tools Status=Design, MCHP-ID=MIC8878, Owner="Dragos Danaila", Populated=YES, Quantity Override=1, Revision=1, Status="MCL Design", Supplier 1=Digi-Key, Symbol="MCP16502 QFN-32", TYPE=Switcher
U4: library part PAC1934T-I/JQ, "IC CURRENT MONITOR 1% 16UQFN", Manufacturer 1="Microchip Technology", Operating Temperature="-40C to +85C", Category=MCHP-Analog, ComponentLink1Description="SVN Datasheet", ComponentLink1URL=https://www.microchip.com/sitesearch/search/Product%20and%20Development%20Tools/PAC1934T-I/JQ, ComponentLink2Description="Local Datasheet", ComponentLink3Description="Open Symbol", ComponentLink3URL="C:\ALTIUM_WORK\00001_MCHP-CDB\Library\LibraryRefs\PAC1934 UQFN-16.SchLib", ComponentLink4Description="Open Footprint", ComponentLink4URL=C:\ALTIUM_WORK\00001_MCHP-CDB\Library\Footprints\UQFN-16_4X4_EP2.6X2.6.PcbLib, ComponentLink5Description="Open Footprint 2", ComponentLink6Description="Open Footprint 3", ComponentLink7Description="Open Footprint 4", Description_="MCHP ANALOG POWER CURRENT SENSE MONITOR PAC1934T-I/JQ UQFN-16", Dev Tools Status=Production, Manufacturer Part Number 1=PAC1934T-I/JQ, MCHP-ID=MIC7010, Owner="Razvan Cristescu", Populated=YES, Quantity Override=1, Restricted Sourcing=No, Revision=2, Status="MCL Design", Supplier 1="Microchip Technology", Supplier Part Number 1=PAC1934T-I/JQ, Symbol="PAC1934 UQFN-16", TYPE="Power/Current Sensor"
U5: "SAMA7D65 MPU 1000MHz Cortex-A7 TFBGA-343", Manufacturer 1="Microchip Technology", Manufacturer Part Number 1=SAMA7D65-V/4HB-SL3, Operating Temperature="-40C to +105C", Category=MCHP-Microcontroller, ComponentLink1Description="SVN Datasheet", ComponentLink1URL=https://www.microchip.com/sitesearch/search/Product%20and%20Development%20Tools/SAMA7D65-V/4HB-SL3, ComponentLink2Description="Local Datasheet", ComponentLink3Description="Open Symbol", ComponentLink3URL=C:\ALTIUM_WORK\00001_MCHP-CDB\Library\LibraryRefs\SAMA7D65-TFBGA-343.SchLib, ComponentLink4Description="Open Footprint", ComponentLink4URL=C:\ALTIUM_WORK\00001_MCHP-CDB\Library\Footprints\TFBGA-343_14x14.PcbLib, ComponentLink5Description="Open Footprint 2", ComponentLink6Description="Open Footprint 3", ComponentLink7Description="Open Footprint 4", Description_="MCHP MPU 32-BIT Cortex-A7 1000MHz 128kB SAMA7D65-V/4HB-SL3 TFBGA-343", Dev Tools Status=Design, MCHP-ID=IC2674, Owner="Ciprian Abramov", Populated=YES, Quantity Override=1, Restricted Sourcing=No, Revision=1, Status="MCL Design", Supplier 1="Microchip Technology", Supplier Part Number 1=SAMA7D65-V/4HB-SL3, Symbol=SAMA7D65-TFBGA-343, TYPE="32-Bit MPU"
U6: library part IC_RAM_IS43TR16512BL-125KBLI, "DDR3L", Manufacturer_Name=ISSI, Copyright="Copyright (C) 2025 Ultra Librarian. All rights reserved.", Manufacturer_Part_Number=IS43TR16512BL-125KBLI, RefDes=RefDes, TYPE=Type
U9: "MRAM Avalanche High Performance Serial P-SRAM 4Mb in SOIC8 package with QSPI - 108MHz interface, 3V, -40 C to 105 C", Manufacturer_Name="Avalanche Technology", Mouser Part Number=793-30042040108X0PSY, Datasheet Link=https://www.mouser.ph/ProductDetail/Avalanche-Technology/AS3004204-0108X0PSAY?qs=eP2BKZSCXI7G0ggegRejGg%3D%3D, Geometry.Height=2.16mm, Manufacturer_Part_Number=AS3004204-0108X0PSAY, Mouser Price/Stock=https://www.mouser.co.uk/ProductDetail/Avalanche-Technology/AS3004204-0108X0PSAY/?qs=eP2BKZSCXI7G0ggegRejGg%3D%3D
U10: "Micro-USB B Receptacle with Flange, Bottom Mount, Surface Mount, Lead-Free", Manufacturer_Name="Molex Connector Corporation", Copyright="Copyright (C) 2025 Ultra Librarian. All rights reserved.", Manufacturer_Part_Number=473460001, RefDes=RefDes, TYPE=Type
U11 U12 U13: "SENSOR ANALOG -40C-125C SOT23-3", Manufacturer_Name=Microchip, Copyright="Copyright (C) 2025 Ultra Librarian. All rights reserved.", Manufacturer_Part_Number=TC1047AVNBTR, RefDes=RefDes, TYPE=Type
U14: "Real-Time Clock Module with I2C-Bus", Package=None, Availability=Unavailable, MP=RV-3129-C3-32.768KHZ-OPTION-A-TB-QA, Price=None
U15: "OSC PROG TIMER TSOT23-6"
U16 U17: "Automotive LVDS Differential Driver"
U18 U19: "Automotive LVDS Differential Line Receiver"
U20 U21: "3.3 V CAN Transceiver with Standby Mode", Package="SOIC-8 Texas Instruments", Check_prices=https://www.snapeda.com/parts/SN65HVD230DR/Texas+Instruments/view-part/?ref=eda, MF="Texas Instruments", MP=SN65HVD230DR, SnapEDA_Link=https://www.snapeda.com/parts/SN65HVD230DR/Texas+Instruments/view-part/?ref=snap
U22: "Low-Power, Slew-Rate-Limited RS-485/RS-422 Transceivers, IC TRANSCEIVER HALF 1/1 8SOIC", Manufacturer_Name="Analog Devices Inc", Manufacturer_Part_Number=MAX485CSA+T, Copyright="Copyright (C) 2025 Ultra Librarian. All rights reserved.", RefDes=RefDes, TYPE=Type
U23: library part LTC2865HMSETRPBF, "Â±60V Fault Protected 3V to 5.5V RS485/RS422 Transceivers", Manufacturer_Name="Analog Devices Inc", Copyright="Copyright (C) 2025 Ultra Librarian. All rights reserved.", Manufacturer_Part_Number=LTC2865HMSE#TRPBF, RefDes=RefDes, TYPE=Type
U24: library part IC_USB_SW_FSUSB74MPX, "USB Switch IC 1 Channel 16-MLP (3x3)", Package="WQFN-16 ON Semiconductor", Check_prices=https://www.snapeda.com/parts/FSUSB74MPX/Onsemi/view-part/?ref=eda, MF="ON Semiconductor", MP=FSUSB74MPX, SnapEDA_Link=https://www.snapeda.com/parts/FSUSB74MPX/Onsemi/view-part/?ref=snap
VR1 VR2: "800-mA 15-V linear voltage regulator", Package="SOT-223-4 Texas Instruments", Check_prices=https://www.snapeda.com/parts/LM1117MP-3.3/NOPB/Texas+Instruments/view-part/?ref=eda, MF="Texas Instruments", MP=LM1117MP-3.3/NOPB, SnapEDA_Link=https://www.snapeda.com/parts/LM1117MP-3.3/NOPB/Texas+Instruments/view-part/?ref=snap
Y1: library part ECS-240-10-37B2-JTN-TR, "CRYSTAL 24 MHZ 10PF SMD", Load Capacitance=10pF, Manufacturer 1="ECS Inc", Operating Temperature="-40C to +85C", Package=L2.0W1.6H0.5, Supplier Part Number 1=50-ECS-240-10-37B2-JTN-TR-ND, Tolerance=20ppm, Category=Crystal/Oscillator, ComponentLink1Description="SVN Datasheet", ComponentLink1URL=https://chn-vm-apps.microchip.com/mchprepo/parts/Datasheets/ECX-1637B2.pdf, ComponentLink2Description="Local Datasheet", ComponentLink2URL=C:\ALTIUM_WORK\00001_MCHP-CDB\Datasheets\ECX-1637B2.pdf, ComponentLink3Description="Open Symbol", ComponentLink3URL="C:\ALTIUM_WORK\00001_MCHP-CDB\Library\LibraryRefs\Crystal 4 Pins.SchLib", ComponentLink4Description="Open Footprint", ComponentLink4URL=C:\ALTIUM_WORK\00001_MCHP-CDB\Library\Footprints\CRYSTAL_L2.0W1.6H0.5_FA-128.PcbLib, ComponentLink5Description="Open Footprint 2", ComponentLink6Description="Open Footprint 3", ComponentLink7Description="Open Footprint 4", Description_="CRYSTAL 24MHz 10pF SMD L2W1.6H0.5", Dev Tools Status=Design, Manufacturer Part Number 1=ECS-240-10-37B2-JTN-TR, MCHP-ID=OSC1299, Owner="Ciprian Abramov", Populated=YES, Quantity Override=1, Revision=1, Status="MCL Design", Supplier 1=Digi-Key, Symbol="Crystal 4 Pins", TYPE=Crystal
Y2: library part "FC-12M 32.7680KA-A3", "CRYSTAL 32.7680KHZ 12.5PF SMD", Load Capacitance=12.5pF, Manufacturer 1=Epson, Operating Temperature="-40°C ~ 85°C", Package="2-SMD, No Lead", Supplier Part Number 1=SER3672CT-ND, Tolerance=20ppm, Category=Crystal/Oscillator, ComponentLink1Description="SVN Datasheet", ComponentLink1URL=https://chn-vm-apps.microchip.com/mchprepo/parts/Datasheets/FC-12D_en.pdf, ComponentLink2Description="Local Datasheet", ComponentLink2URL=C:\ALTIUM_WORK\00001_MCHP-CDB\Datasheets\FC-12D_en.pdf, ComponentLink3Description="Open Symbol", ComponentLink3URL="C:\ALTIUM_WORK\00001_MCHP-CDB\Library\LibraryRefs\Crystal 2 Pins.SchLib", ComponentLink4Description="Open Footprint", ComponentLink4URL=C:\ALTIUM_WORK\00001_MCHP-CDB\Library\Footprints\CRYSTAL_FC-12M_L2.05W1.2H0.6.PcbLib, ComponentLink5Description="Open Footprint 2", ComponentLink6Description="Open Footprint 3", ComponentLink7Description="Open Footprint 4", Description_="CRYSTAL 32.768KHZ 12.5PF SMD 2-SMD, No Lead, FC-12M 32.7680KA-A3", Dev Tools Status=Design, Manufacturer Part Number 1="FC-12M 32.7680KA-A3", MCHP-ID=OSC1269, Owner="Dragos Danaila", Populated=YES, Quantity Override=1, Revision=1, Status="MCL Design", Supplier 1=Digikey, Symbol="Crystal 2 Pins", TYPE=Crystal

## Via types
v1: diameter 13.78, hole 5.91, L1 TOP to L6 BOT, 276 vias
v2: diameter 13.78, hole 7.87, L1 TOP to L6 BOT, 71 vias
v3: diameter 15.75, hole 7.87, L1 TOP to L6 BOT, 25 vias
v4: diameter 15.75, hole 7.87, L1 TOP to L6 BOT, tented both sides, 9 vias
v5: diameter 13.78, hole 7.87, L1 TOP to L6 BOT, tented both sides, 2 vias

## Nets (pads, with @x,y where several pads share a name; then routed paths per layer and width w, separated by ;. In a path a pad name is that pad's centre, name@x,y a point inside that pad or via, vN(x,y) a via of type N, cw(c..) or ccw(c..) an arc to the next point about the centre after c; other vN are vias at no path point)
3.3_VBAT: C13.1 C163.2 J4.1 R60.1 U14.9
3V3: C25.2 C26.2 C27.2 C28.2 C60.2 C61.2 C62.2 C63.2 C66.2 C67.2 C68.2 C69.2 C70.2 C149.2 C150.2 C151.2 C152.2 C153.2 C154.2 C155.2 C156.2 C158.2 C160.2 C162.2 C164.2 C183.2 C184.2 CR1.5 CR2.5 J13.2 J14.P4 J15.1 R36.1 R37.1 R39.2 R40.2 R41.2 R42.2 R46.2 R50.1 R51.1 R69.1 R77.1 R104.1 R109.1 R110.1 R112.1 R144.1 R152.1 R157.1 R185.2 R186.2 R187.2 R188.2 R189.2 R190.2 R191.2 R192.1 R194.1 R195.1 R199.1 R200.1 R201.1 R235.2 TP5.0 U4.2 U4.15 U5.C17 U5.F13 U5.G7 U5.H19 U5.L3 U5.L19 U5.P19 U5.T13 U9.8 U11.1 U12.1 U13.1 U14.2 U15.1 U24.4 | length 281.8
  L1 TOP w11.81: v1(1256.56,1576.18) 1256.94,1575.81 1270.72,1575.81 U5.L3@1271.32,1575.2 ; v1(1360.89,1664.77) U5.G7@1373.69,1677.56 ; v1(1527.23,1432.48) U5.T13@1527.23,1447.25 ; U5.F13@1527.23,1703.15 v1(1527.23,1716.93) ; U5.C17@1629.59,1779.93 v1(1629.59,1799.61) ; U5.P19@1680.77,1498.43 v1(1696.92,1498.43) ; U5.L19@1680.77,1575.2 v1(1695.54,1575.2) ; U5.H19@1680.77,1651.97 1695.38,1651.97 v1(1695.54,1652.12)
  L6 BOT w11.81: C68.2@1241.3,1575.2 1241.91,1575.81 1256.18,1575.81 v1(1256.56,1576.18) ; v1(1360.89,1664.77) 1373.19,1664.77 C70.2@1379.1,1670.67 ; C60.2@1527.23,1417.23 v1(1527.23,1432.48) ; v1(1527.23,1716.93) C66.2@1527.23,1733.17 ; v1(1629.59,1799.61) C62.2@1629.59,1814.87 ; v1(1695.54,1575.2) C61.2@1710.79,1575.2 ; v1(1695.54,1652.12) 1695.69,1651.97 C63.2@1710.79,1651.97 ; v1(1696.92,1498.43) 1697.15,1498.2 C67.2@1710.89,1498.2
  L6 BOT w13.78: 1351.29,1647.05 v1(1360.89,1664.77)
  L6 BOT w15.75: C69.2@1348.09,1641.15 1351.29,1647.05
3V3_COM: C15.2 C16.2 C165.2 C166.2 C167.2 C168.2 C169.2 C170.2 C171.2 C172.2 C173.2 C174.2 C176.2 C177.2 C180.2 C181.2 C182.2 J9.03 J9.04 J9.17 J9.18 J11.2 R12.2 R226.1 R227.1 R229.2 R230.2 U16.1 U17.1 U18.1 U19.1 U20.3 U21.3 U22.8 U23.5 U23.12 VR1.2 VR1.4
3V3_eMMC: C18.2 C19.2 C64.2 C65.2 C125.2 C126.2 C127.2 C128.2 C129.2 C130.2 C131.2 C132.2 C133.2 C134.2 C137.2 C138.2 C139.2 C140.2 C141.2 C142.2 C143.2 C144.2 C145.2 C146.2 R13.2 R167.1 R168.1 R169.1 R170.1 R171.1 R172.1 R173.1 R174.1 R175.1 R176.1 R177.1 R178.1 R179.1 R180.1 R181.1 R182.1 R183.1 R184.1 U5.F9 U5.W17 U7.F2@2602.35,1028.11 U7.F3@2602.35,988.74 U7.F4@2602.35,949.37 U7.F5@2602.35,910 U7.F6@2602.35,870.63 U7.F7@2602.35,831.26 U7.F8@2602.35,791.89 U7.F9@2602.35,752.52 U7.H3@2523.61,988.74 U7.H8@2523.61,791.89 U7.L2@2405.5,1028.11 U7.L4@2405.5,949.37 U7.L7@2405.5,831.26 U7.L9@2405.5,752.52 U7.P3@2287.39,988.74 U7.P8@2287.39,791.89 U8.F2@2607.6,1834.57 U8.F3@2607.6,1795.2 U8.F4@2607.6,1755.83 U8.F5@2607.6,1716.46 U8.F6@2607.6,1677.09 U8.F7@2607.6,1637.72 U8.F8@2607.6,1598.35 U8.F9@2607.6,1558.98 U8.H3@2528.86,1795.2 U8.H8@2528.86,1598.35 U8.L2@2410.75,1834.57 U8.L4@2410.75,1755.83 U8.L7@2410.75,1637.72 U8.L9@2410.75,1558.98 U8.P3@2292.64,1795.2 U8.P8@2292.64,1598.35 VR2.2 VR2.4 | length 2526.6
  L1 TOP w5.91: v2(2385.2,968.48) 2385.79,968.48 2404.9,949.37 U7.L4@2405.5,949.37 ; v2(2385.2,1046.48) 2386.16,1046.48 2402.62,1030.02 U7.L2@2402.62,1029.06 ; v2@2388.52,735.54 U7.L9@2405.5,752.52 ; v2@2388.52,848.24 U7.L7@2405.5,831.26 ; v2@2390.56,1851.94 U8.L2@2407.54,1834.96 ; v2(2391.03,1772.97) 2392.1,1772.97 2409.35,1755.72 U8.L4@2410.42,1755.72 ; v2@2393.44,1541.88 U8.L9@2410.42,1558.87 ; v2@2393.44,1654.59 U8.L7@2410.42,1637.61 ; U7.H8@2523.61,791.89 v2@2540.59,808.87 ; U7.H3@2523.61,988.74 2523.61,991.87 2532.15,1000.4 v2(2532.15,1002.53) ; U8.H8@2528.53,1598.24 v2@2545.51,1615.22 ; U8.H3@2528.53,1795.09 v2@2545.51,1812.07 ; U7.F9@2602.35,752.52 v2@2619.33,735.54 ; U7.F8@2602.35,791.89 v2@2619.33,774.91 ; U7.F7@2602.35,831.26 v2@2619.33,814.28 ; U7.F6@2602.35,870.63 v2@2619.33,853.65 ; U7.F5@2602.35,910 v2@2619.33,893.02 ; U7.F4@2602.35,949.37 v2@2619.33,932.39 ; U7.F3@2602.35,988.74 v2@2619.33,971.76 ; U7.F2@2602.35,1028.11 2602.35,1027.41 2619.33,1010.43 v2(2619.33,1009.73) ; U8.F9@2607.27,1558.87 v2@2624.25,1541.88 ; U8.F8@2607.27,1598.24 v2@2624.25,1581.25 ; U8.F7@2607.27,1637.61 v2@2624.25,1620.62 ; U8.F6@2607.27,1676.98 v2@2624.25,1659.99 ; U8.F5@2607.27,1716.35 v2@2624.25,1699.36 ; U8.F4@2607.27,1755.72 v2@2624.25,1738.73 ; U8.F3@2607.27,1795.09 v2@2624.25,1778.1 ; U8.F2@2607.27,1834.46 2607.27,1833.76 2624.25,1816.78 v2(2624.25,1816.08)
  L1 TOP w9.84: v2(2258.2,989.48) 2258.57,989.11 U7.P3@2287.02,989.11 ; v2@2259.21,792.24 U7.P8@2287.03,792.24 ; v2@2264.13,1598.59 U8.P8@2291.95,1598.59 ; v2@2264.13,1795.44 U8.P3@2291.95,1795.44
  L1 TOP w11.81: U5.F9@1424.87,1703.15 v1(1424.87,1717.92) ; v1(1629.59,1355.71) U5.W17@1629.59,1370.48
  L6 BOT w4.92: C65.2@1424.87,1733.17 1425.23,1732.81 C65.2@1425.23,1731.87
  L6 BOT w7.87: 1415.02,1935.44 1415.02,1806.5 1441.6,1779.93 1441.6,1745.48 C65.2@1430.77,1734.65
  L6 BOT w9.84: v2(2258.2,989.48) C134.2@2288.2,989.48 ; v2(2259.2,791.48) 2259.95,790.72 2279.35,790.72 2280.2,791.58 C133.2@2280.2,792.48 ; v2(2263.12,1597.83) 2263.48,1598.18 2284.48,1598.18 C145.2@2285.12,1598.83 ; v2(2265.12,1795.83) 2286.84,1795.83 C144.2@2291.12,1800.11 ; C132.2@2365.89,791.48 2365.89,757.46 v2(2388.52,734.84) ; C132.2@2367.48,791.48 2367.48,827.9 v2(2387.82,848.24) ; v2(2385.2,968.48) 2384.45,969.23 2375.45,969.23 2363.67,981.01 2363.67,1001.29 C131.2@2363.48,1001.48 2363.48,1024.76 v2(2385.2,1046.48) ; v2(2389.86,1851.94) 2370.81,1832.89 2370.81,1793.03 2390.88,1772.97 v2(2391.03,1772.97) ; v2(2392.74,1654.59) 2370.81,1632.66 2370.81,1563.81 v2(2393.44,1541.19) ; C130.2@2516.33,792.52 2516.33,793.23 2522.19,799.1 2528.28,799.1 2536.77,807.6 2537.56,807.6 2540.59,810.63 v2@2540.59,811.39 ; C129.2@2516.33,987.52 2516.33,991.6 2526.5,1001.78 2531.39,1001.78 v2(2532.15,1002.53) ; C140.2@2521.25,1598.87 2521.25,1602.99 2523.71,1605.45 2535.05,1605.45 v2(2545.51,1615.92) ; C141.2@2521.25,1793.87 2521.25,1794.58 2527.11,1800.45 2531.4,1800.45 2541.75,1810.8 2542.48,1810.8 2544.45,1812.77 v2(2545.51,1812.77) ; C125.2@2596.33,747.13 2619.33,747.13 ; C127.2@2596.33,842.52 2619.33,842.52 ; C128.2@2596.33,937.52 v2@2619.33,937.52 ; C126.2@2596.33,1032.52 2596.33,1031.8 2618.39,1009.73 v2(2619.33,1009.73) v2(2619.33,971.06) v2(2619.33,931.69) v2(2619.33,892.32) v2(2619.33,852.95) v2(2619.33,813.58) v2(2619.33,774.21) 2619.33,747.13 ; C138.2@2601.25,1553.48 2624.25,1553.48 ; C143.2@2601.25,1648.87 2624.25,1648.87 ; C142.2@2601.25,1743.87 v2@2624.25,1743.87 ; C137.2@2601.25,1838.87 2601.25,1838.15 2623.32,1816.08 v2(2624.25,1816.08) v2(2624.25,1777.41) v2(2624.25,1738.04) v2(2624.25,1698.67) v2(2624.25,1659.3) v2(2624.25,1619.93) v2(2624.25,1580.56) 2624.25,1553.48 ; v2(2619.33,734.84) 2619.33,747.13 ; v2(2624.25,1541.19) 2624.25,1553.48
  L6 BOT w13.78: v1(1424.87,1717.92) 1424.87,1733.17 1426.34,1734.65 C65.2@1430.77,1734.65 ; C64.2@1629.59,1340.46 v1(1629.59,1355.71)
  L6 BOT w15.75: 1415.02,1935.44 1415.02,1949.22
  other v2: 2540.59,809.57
5V: C11.2 C12.2 C14.2 C17.2 C20.2 C23.2 C29.2 C31.2 C33.2 C34.2 L1.2 R9.2 R10.1 R44.2 TP3.0 U3.4 U3.10 U3.15 U3.20 U3.26 U3.31 VR1.3 VR2.3 | length 336.2
  L1 TOP w11.81: v3@922.3,2749.36 922.3,2746.79 922.98,2746.11 U3.10@953.49,2746.11 ; v3@922.98,2647.68 U3.15@953.49,2647.68 ; v2(1027.56,2562.99) 1027.56,2563.52 1042.29,2578.25 U3.20@1042.29,2598.15 ; U3.26@1150.34,2647.68 1173.93,2647.68 1180.85,2647.68 1193.85,2634.69 v3(1193.85,2633.91) ; U3.31@1150.34,2746.11 1174.95,2746.11 1191.68,2762.84 ; v3(1182.82,2748.08) 1191.68,2756.93 1191.68,2762.84 ; 1191.68,2769.24 1191.68,2762.84
  L6 BOT w11.81: C34.2@1023.62,2533.46 1023.62,2558.52 1027.56,2562.46 v2(1027.56,2562.99) 1070.87,2562.99 1079.61,2554.25 1079.61,2533.59 R44.2@1079.73,2533.47
  other v3: 1199.34,2616 1183.34,2617 903.29,2628 921.01,2628 1199.34,2645 903.29,2645.71 921.01,2645.71 903.29,2748.08 921.01,2748.08 1200.54,2748.08 903.29,2765.79 921.01,2765.79 1182.82,2765.79 1200.54,2765.79
12V: C1.2 C2.2 C3.2 C9.2 C10.2 D2.1 J1.1 J1.2 J1.3 R1.2 R2.2 R3.2 SB1.2 TP2.0 U1.6 U2.7
12V_CONN: C4.2 C5.2 J3.1 J3.2 R4.1 SB1.1 TP1.0 U1.5
ADC_TEMP_1: C157.2 R125.2 R196.2
ADC_TEMP_2: C159.2 R127.2 R197.2
ADC_TEMP_3: C161.2 R129.2 R198.2
AUXOFF: R1.1 U1.3 | length 71.4
  L1 TOP w7.87: R1.1@2115,3278.38 2119.58,3278.38 2155.12,3242.84 2155.12,3227.66 U1.3@2156.11,3226.67
BUS_3V3: J7.27 J7.28
BUS_5V: J7.25 J7.26
CAN_H: CR3.1 CR4.1 R211.1 R213.1 R217.1 R219.1 U20.7 U21.7
CAN_H_main: J1.9 J6.03 J12.1 R31.1 R211.2
CAN_L: CR3.2 CR4.2 R212.1 R215.2 R218.1 R221.2 U20.6 U21.6
CAN_L_main: J1.8 J6.01 J12.2 R32.2 R212.2
DCDC1: C21.1 L2.2 R46.1 U3.9 | length 97.7
  L1 TOP w31.5: C21.1@756.42,2889.76 756.42,2887.8 757.41,2886.81 757.41,2824.8 759.38,2822.83 L2.2@788.9,2822.83
DCDC2: C24.1 L3.2 R47.1 U3.16 | length 105.6
  L1 TOP w31.5: C24.1@756.42,2503.94 756.42,2575.79 759.38,2578.74 L3.2@788.9,2578.74
DCDC3: C30.1 L4.2 R48.1 U3.25 | length 104.1
  L1 TOP w31.5: L4.2@1314.37,2580.71 1343.9,2580.71 1348.19,2576.41 C30.1@1348.19,2507.87
DCDC4: C32.1 L5.2 R49.1 U3.32 | length 100.2